# Altium PCB PCB_MEA_4_Well.PcbDoc
Units mm, origin at the board's own origin, x right, y up, seen from the top; angles counter-clockwise.
Board outline 49 x 49 mm, 4 copper layers (Top Copper Layer, Internal Copper Layer 1, Internal Copper Layer 2, Bottom Copper Layer), stack 1.58 mm thick; 1 components, 60 nets, 120 pads, 6 vias.
Unrouted connection lines stored in the file: 30.
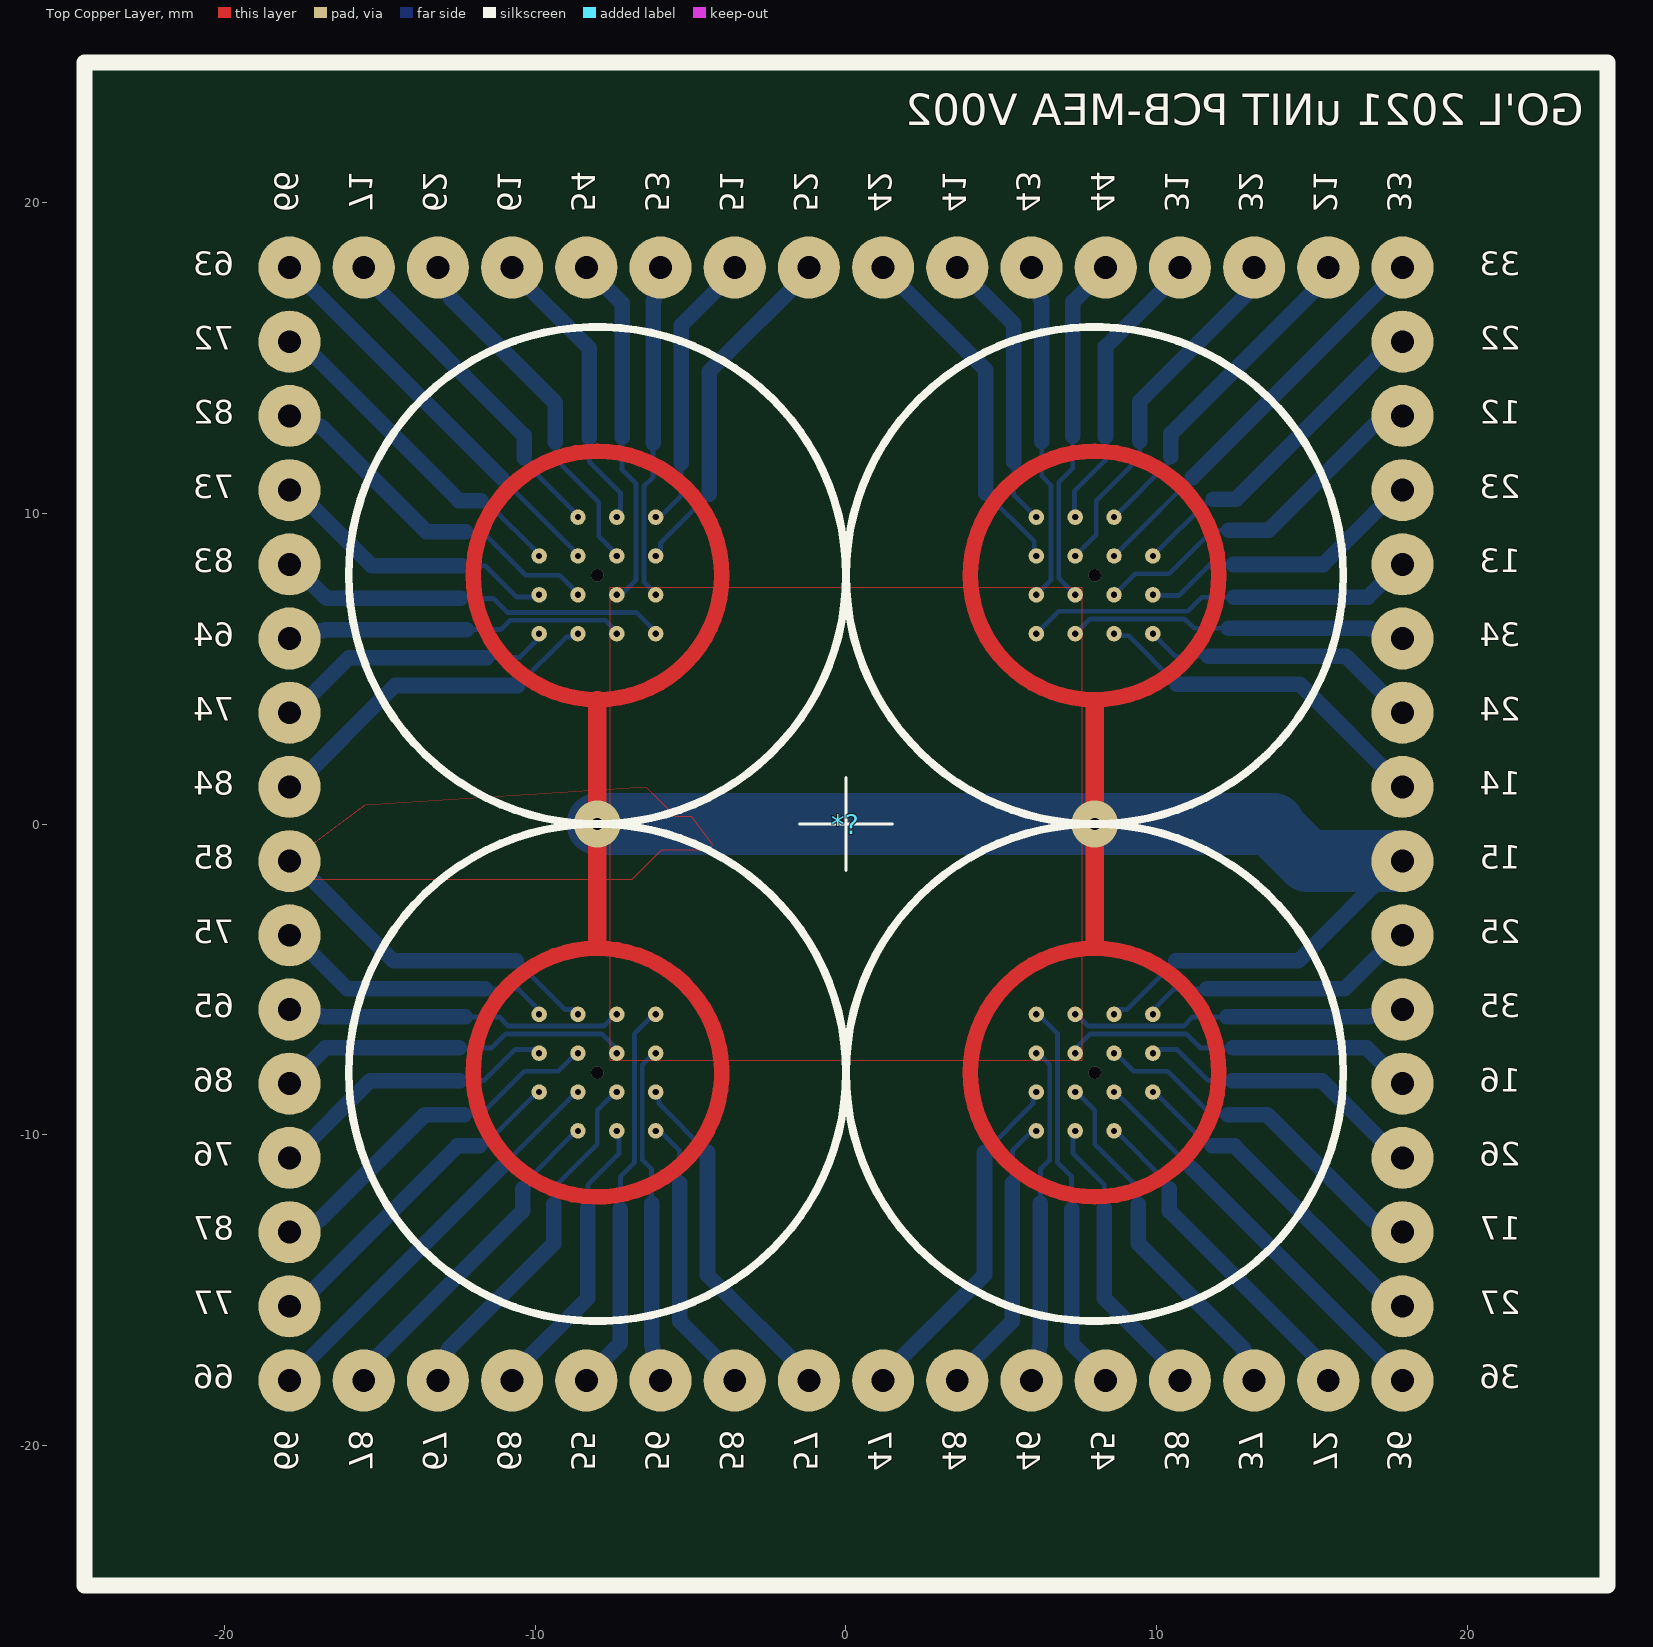
[diagram p0: Top Copper Layer view]
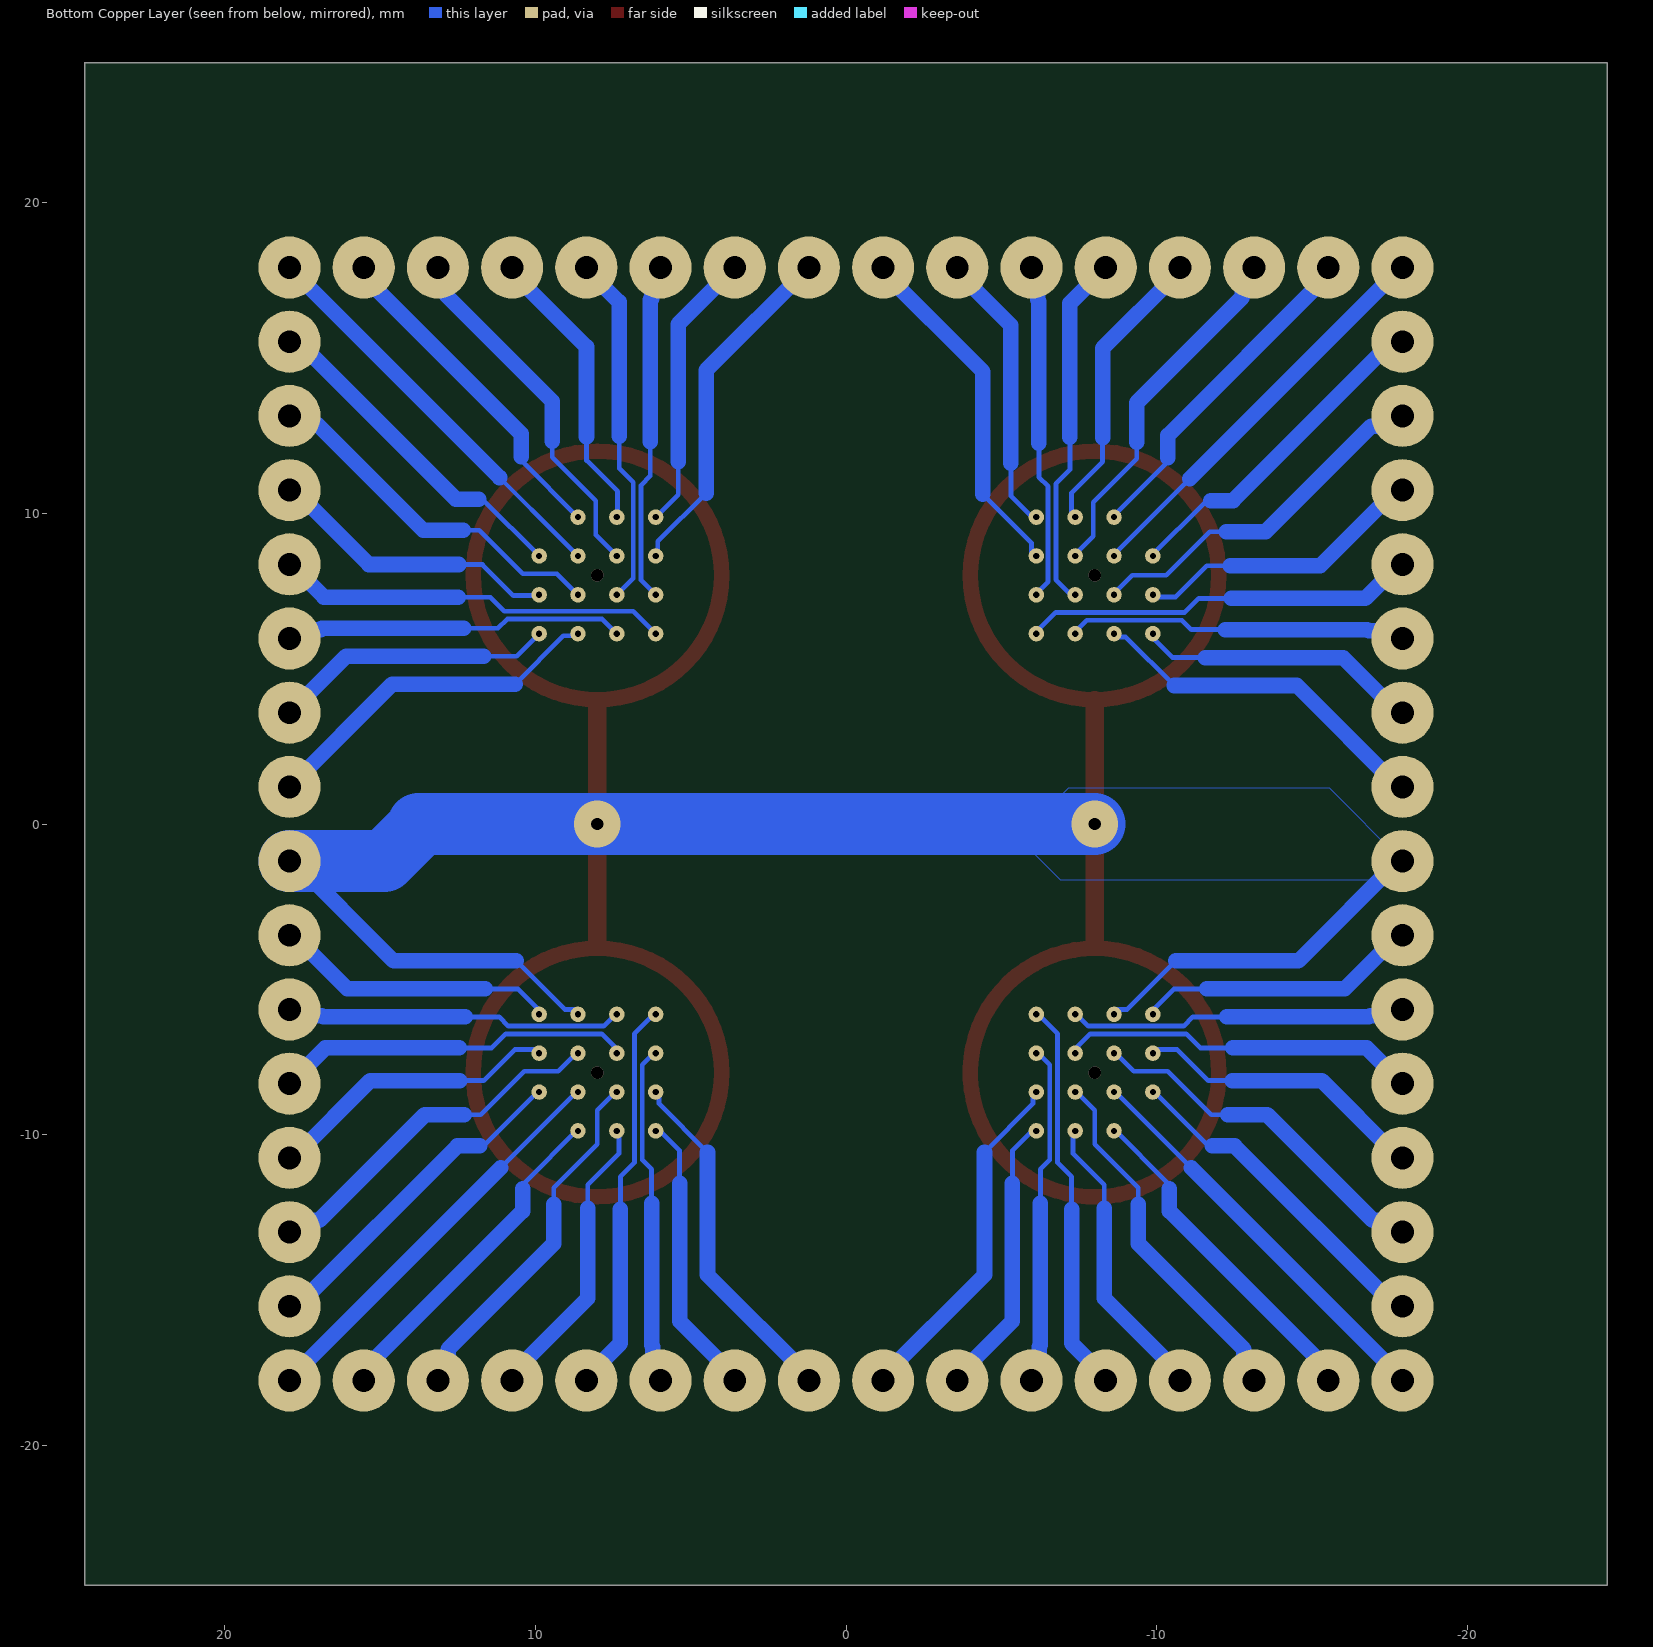
[diagram p1: Bottom Copper Layer view, seen from below]

## Layer stack, top to bottom
Top Solder: solder mask 0.01, Solder Resist, Dk 3.5
Top Copper Layer: signal copper 0.035
Dielectric 1: prepreg 0.22, FR-4, Dk 4.2
Internal Copper Layer 1: signal copper 0.035
Dielectric 2: core 1, FR-4, Dk 4.2
Internal Copper Layer 2: signal copper 0.035
Dielectric 3: prepreg 0.22, FR-4, Dk 4.2
Bottom Copper Layer: signal copper 0.035
Bottom Solder: solder mask 0.01, Solder Resist, Dk 3.5

## Board outline
24.5,-24.5 -24.5,-24.5 -24.5,24.5 24.5,24.5

## Design rules (kind name [scope] priority, off if disabled: settings)
BoardOutlineClearance [All] p1: gap=0.4 ignorepadtopadclearanceinfootprint=FALSE
Clearance [All] p1: gap=0.102 ignorepadtopadclearanceinfootprint=TRUE
ComponentClearance [All] p1: gap=0.15 collisioncheckmode=3 verticalgap=0.15 showdistances=FALSE
HoleSize [All] p1: absolutevalues=TRUE maxlimit=0.4 minlimit=0.25 maxpercent=80.000 minpercent=20.000
HoleToHoleClearance [All] p1: gap=0.45 allowstackedmicrovias=TRUE
MinimumAnnularRing [All] p1: minimumring=0.15
MinimumSolderMaskSliver [All] p1: minsoldermaskwidth=0.15
PlaneClearance [All] p1: clearance=0.15
PlaneConnect [All] p1: planeconnectstyle=Relief reliefexpansion=0.25 reliefentries=4 reliefconductorwidth=0.15 reliefairgap=0.15
PolygonConnect [All] p1: connectstyle=Direct reliefconductorwidth=0.15 reliefentries=4 polygonreliefangle="90 Angle" airgapwidth=0.15
RoomDefinition PCB_MCS_MEA_REF [InComponentClass('PCB_MCS_MEA_REF')] p1 off: confinementstyle=ConfineIn formatcopy=TRUE lockcomponents=FALSE outline -24.5,-24.5 26.3,-24.5 26.3,0.9 -24.5,0.9
RoutingVias [All] p1: holewidth=0.25 width=0.55 viastyle="Through Hole" minholewidth=0.25 minwidth=0.55 maxholewidth=0.4 maxwidth=0.8
SilkToSilkClearance [All] p1: silktosilkclearance=0.2
SilkToSolderMaskClearance [IsPad] p1: minsilkscreentomaskgap=0.2 clearancetoexposedcopper=TRUE
SolderMaskExpansion [All] p1: expansion=0.15 istentingtop=FALSE
Width [All] p1: maxlimit=50 minlimit=0.15 preferedwidth=0.203
22 further rules are at their usual default settings.

## Components (designator, comment, footprint, x,y, rotation, side; value= is the part's Value field where it differs from the comment)
*? "POGO_PINS" MCS_MEA_4WELL_1P25 0,0 r180 top locked

## Footprints (in the part's own frame and the unit in brackets; to place one, negate y for a bottom-side part, rotate by r counter-clockwise, add the part's x,y. Pads: shape width x height; smd on the part's side, far side on the other; paste and mask are expansions set on the pad)
MCS_MEA_4WELL_1P25 [mm]
  round 2 hole 0.737 mask+0.15: 12(-17.907,-13.132) 13(-17.907,-8.357) 14(-17.907,-1.194) 15(-17.907,1.194) 16(-17.907,8.357) 17(-17.907,13.132) 21(-15.519,-17.907) 22(-17.907,-15.519) 23(-17.907,-10.744) 24(-17.907,-3.581) 25(-17.907,3.581) 26(-17.907,10.744) 27(-17.907,15.519) 28(-15.519,17.907) 31(-10.744,-17.907) 32(-13.132,-17.907) 33(-17.907,-17.907) 34(-17.907,-5.969) 35(-17.907,5.969) 36(-17.907,17.907) 37(-13.132,17.907) 38(-10.744,17.907) 41(-3.581,-17.907) 42(-1.194,-17.907) 43(-5.969,-17.907) 44(-8.357,-17.907) 45(-8.357,17.907) 46(-5.969,17.907) 47(-1.194,17.907) 48(-3.581,17.907) 51(3.581,-17.907) 52(1.194,-17.907) 53(5.969,-17.907) 54(8.357,-17.907) 55(8.357,17.907) 56(5.969,17.907) 57(1.194,17.907) 58(3.581,17.907) 61(10.744,-17.907) 62(13.132,-17.907) 63(17.907,-17.907) 64(17.907,-5.969) 65(17.907,5.969) 66(17.907,17.907) 67(13.132,17.907) 68(10.744,17.907) 71(15.519,-17.907) 72(17.907,-15.519) 73(17.907,-10.744) 74(17.907,-3.581) 75(17.907,3.581) 76(17.907,10.744) 77(17.907,15.519) 78(15.519,17.907) 82(17.907,-13.132) 83(17.907,-8.357) 84(17.907,-1.194) 85(17.907,1.194) 86(17.907,8.357) 87(17.907,13.132)
  round 0.5 hole 0.2 mask+0: 12(-9.875,-8.625) 13(-9.875,-7.375) 14(-9.875,-6.125) 15(-9.875,6.125) 16(-9.875,7.375) 17(-9.875,8.625) 21(-8.625,-9.875) 22(-8.625,-8.625) 23(-8.625,-7.375) 24(-8.625,-6.125) 25(-8.625,6.125) 26(-8.625,7.375) 27(-8.625,8.625) 28(-8.625,9.875) 31(-7.375,-9.875) 32(-7.375,-8.625) 33(-7.375,-7.375) 34(-7.375,-6.125) 35(-7.375,6.125) 36(-7.375,7.375) 37(-7.375,8.625) 38(-7.375,9.875) 41(-6.125,-9.875) 42(-6.125,-8.625) 43(-6.125,-7.375) 44(-6.125,-6.125) 45(-6.125,6.125) 46(-6.125,7.375) 47(-6.125,8.625) 48(-6.125,9.875) 51(6.125,-9.875) 52(6.125,-8.625) 53(6.125,-7.375) 54(6.125,-6.125) 55(6.125,6.125) 56(6.125,7.375) 57(6.125,8.625) 58(6.125,9.875) 61(7.375,-9.875) 62(7.375,-8.625) 63(7.375,-7.375) 64(7.375,-6.125) 65(7.375,6.125) 66(7.375,7.375) 67(7.375,8.625) 68(7.375,9.875) 71(8.625,-9.875) 72(8.625,-8.625) 73(8.625,-7.375) 74(8.625,-6.125) 75(8.625,6.125) 76(8.625,7.375) 77(8.625,8.625) 78(8.625,9.875) 82(9.875,-8.625) 83(9.875,-7.375) 84(9.875,-6.125) 85(9.875,6.125) 86(9.875,7.375) 87(9.875,8.625)
  silkscreen extent -24.5,-24.5 24.5,24.5

## Via types
v1: diameter 0.4, hole 0.4, Top Copper Layer to Bottom Copper Layer, 4 vias
v2: diameter 1.5, hole 0.4, Top Copper Layer to Bottom Copper Layer, 2 vias

## Nets (pads, with @x,y where several pads share a name; then routed paths per layer and width w, separated by ;. In a path a pad name is that pad's centre, name@x,y a point inside that pad or via, vN(x,y) a via of type N, cw(c..) or ccw(c..) an arc to the next point about the centre after c; other vN are vias at no path point)
E0: *?.72 | length 13.1
  Bottom Copper Layer w0.152: -11.057,11.107 -9.035,9.085 *?.72@-8.532,8.582
  Bottom Copper Layer w0.5: -17.814,17.864 -11.057,11.107
E1: *?.82 | length 10.9
  Bottom Copper Layer w0.152: -11.733,10.407 -11.607,10.407 *?.82@-9.782,8.582
  Bottom Copper Layer w0.5: -17.814,15.476 -17.526,15.476 -12.457,10.407 -11.733,10.407
E2: *?.73 | length 11.7
  Bottom Copper Layer w0.152: -12.229,9.407 -11.707,9.407 -10.307,8.007 -9.207,8.007 *?.73@-8.532,7.332
  Bottom Copper Layer w0.5: -17.814,13.089 -17.527,12.802 -16.902,12.802 -13.507,9.407 -12.229,9.407
E3: *?.83 | length 9.4
  Bottom Copper Layer w0.152: -12.372,8.307 -11.607,8.307 -10.607,7.307 -9.807,7.307 *?.83@-9.782,7.332
  Bottom Copper Layer w0.5: -17.814,10.701 -17.651,10.701 -15.257,8.307 -12.372,8.307
E4: *?.64 | length 11
  Bottom Copper Layer w0.152: -12.203,6.257 -11.107,6.257 -10.811,6.553 -7.753,6.553 *?.64@-7.282,6.082
  Bottom Copper Layer w0.5: *?.64@-17.814,5.926 -17.527,6.213 -16.815,6.213 -16.771,6.257 -12.203,6.257
E5: *?.74 | length 11.3
  Bottom Copper Layer w0.152: -10.557,4.457 -8.999,6.015 -8.599,6.015 *?.74@-8.532,6.082
  Bottom Copper Layer w0.5: -17.814,1.151 -14.508,4.457 -10.557,4.457
E6: *?.84 | length 9.1
  Bottom Copper Layer w0.152: -11.563,5.357 -10.507,5.357 *?.84@-9.782,6.082
  Bottom Copper Layer w0.5: -17.814,3.538 -15.995,5.357 -11.563,5.357
E7: *?.85 | length 9.1
  Bottom Copper Layer w0.152: -11.613,-5.307 -10.557,-5.307 *?.85@-9.832,-6.032
  Bottom Copper Layer w0.5: -17.864,-3.488 -16.045,-5.307 -11.613,-5.307
E8: *?.75 | length 11.3
  Bottom Copper Layer w0.152: -10.607,-4.407 -9.049,-5.965 -8.649,-5.965 *?.75@-8.582,-6.032
  Bottom Copper Layer w0.5: -17.864,-1.101 -14.558,-4.407 -10.607,-4.407
E9: *?.65 | length 11
  Bottom Copper Layer w0.152: -12.253,-6.207 -11.157,-6.207 -10.861,-6.503 -7.803,-6.503 *?.65@-7.332,-6.032
  Bottom Copper Layer w0.5: *?.65@-17.864,-5.876 -17.577,-6.163 -16.865,-6.163 -16.821,-6.207 -12.253,-6.207
E10: *?.86
E11: *?.76 | length 21.1
  Bottom Copper Layer w0.152: -12.422,-8.257 -11.657,-8.257 -10.657,-7.257 -9.857,-7.257 -9.832,-7.282 ; -12.279,-9.357 -11.757,-9.357 -10.357,-7.957 -9.257,-7.957 *?.76@-8.582,-7.282
  Bottom Copper Layer w0.5: -17.864,-13.039 -17.577,-12.752 -16.952,-12.752 -13.557,-9.357 -12.279,-9.357 ; *?.76@-17.864,-10.651 -17.701,-10.651 -15.307,-8.257 -12.422,-8.257
E12: *?.87 | length 10.9
  Bottom Copper Layer w0.152: -11.783,-10.357 -11.657,-10.357 *?.87@-9.832,-8.532
  Bottom Copper Layer w0.5: -17.864,-15.426 -17.576,-15.426 -12.507,-10.357 -11.783,-10.357
E13: *?.77 | length 13.1
  Bottom Copper Layer w0.152: -11.107,-11.057 -9.085,-9.035 *?.77@-8.582,-8.532
  Bottom Copper Layer w0.5: -17.864,-17.814 -11.107,-11.057
E14: *?.66 | length 11.4
  Bottom Copper Layer w0.152: -12.443,-7.207 -11.4,-7.207 -10.95,-6.757 -7.857,-6.757 *?.66@-7.332,-7.282
  Bottom Copper Layer w0.5: -17.864,-8.264 -17.814,-8.264 -16.757,-7.207 -12.443,-7.207
E15: *?.78 | length 10.9
  Bottom Copper Layer w0.152: -10.407,-11.733 -10.407,-11.607 *?.78@-8.582,-9.782
  Bottom Copper Layer w0.5: *?.78@-15.476,-17.814 -15.476,-17.526 -10.407,-12.457 -10.407,-11.733
E16: *?.67 | length 11.7
  Bottom Copper Layer w0.152: -9.407,-12.229 -9.407,-11.707 -8.007,-10.307 -8.007,-9.207 *?.67@-7.332,-8.532
  Bottom Copper Layer w0.5: *?.67@-13.089,-17.814 -12.802,-17.527 -12.802,-16.902 -9.407,-13.507 -9.407,-12.229
E17: *?.68 | length 9.4
  Bottom Copper Layer w0.152: -8.307,-12.372 -8.307,-11.607 -7.307,-10.607 -7.307,-9.807 *?.68@-7.332,-9.782
  Bottom Copper Layer w0.5: *?.68@-10.701,-17.814 -10.701,-17.651 -8.307,-15.257 -8.307,-12.372
E18: *?.55 | length 12.7
  Bottom Copper Layer w0.152: -7.257,-12.393 -7.257,-11.35 -6.807,-10.9 -6.807,-6.757 *?.55@-6.082,-6.032
  Bottom Copper Layer w0.5: *?.55@-8.314,-17.814 -8.314,-17.764 -7.257,-16.707 -7.257,-12.393
E19: *?.56 | length 11
  Bottom Copper Layer w0.152: -6.257,-12.203 -6.257,-11.107 -6.553,-10.811 -6.553,-7.753 *?.56@-6.082,-7.282
  Bottom Copper Layer w0.5: -6.257,-12.203 -6.257,-16.771 -6.213,-16.815 -6.213,-17.527 *?.56@-5.926,-17.814
E20: *?.58 | length 9.1
  Bottom Copper Layer w0.152: *?.58@-6.082,-9.782 -5.357,-10.507 -5.357,-11.563
  Bottom Copper Layer w0.5: -5.357,-11.563 -5.357,-15.995 *?.58@-3.538,-17.814
E21: *?.57 | length 11.3
  Bottom Copper Layer w0.152: *?.57@-6.082,-8.532 -6.015,-8.599 -6.015,-8.999 -4.457,-10.557
  Bottom Copper Layer w0.5: -4.457,-10.557 -4.457,-14.508 *?.57@-1.151,-17.814
E22: *?.47 | length 11.3
  Bottom Copper Layer w0.152: 4.457,-10.557 6.015,-8.999 6.015,-8.599 *?.47@6.082,-8.532
  Bottom Copper Layer w0.5: *?.47@1.151,-17.814 4.457,-14.508 4.457,-10.557
E23: *?.48 | length 9.1
  Bottom Copper Layer w0.152: 5.357,-11.563 5.357,-10.507 *?.48@6.082,-9.782
  Bottom Copper Layer w0.5: *?.48@3.538,-17.814 5.357,-15.995 5.357,-11.563
E24: *?.46 | length 11
  Bottom Copper Layer w0.152: *?.46@6.082,-7.282 6.553,-7.753 6.553,-10.811 6.257,-11.107 6.257,-12.203
  Bottom Copper Layer w0.5: *?.46@5.926,-17.814 6.213,-17.527 6.213,-16.815 6.257,-16.771 6.257,-12.203
E25: *?.45 | length 12.7
  Bottom Copper Layer w0.152: *?.45@6.082,-6.032 6.807,-6.757 6.807,-10.9 7.257,-11.35 7.257,-12.393
  Bottom Copper Layer w0.5: 7.257,-12.393 7.257,-16.707 8.314,-17.764 *?.45@8.314,-17.814
E26: *?.38 | length 9.4
  Bottom Copper Layer w0.152: *?.38@7.332,-9.782 7.307,-9.807 7.307,-10.607 8.307,-11.607 8.307,-12.372
  Bottom Copper Layer w0.5: 8.307,-12.372 8.307,-15.257 10.701,-17.651 *?.38@10.701,-17.814
E27: *?.37 | length 11.7
  Bottom Copper Layer w0.152: *?.37@7.332,-8.532 8.007,-9.207 8.007,-10.307 9.407,-11.707 9.407,-12.229
  Bottom Copper Layer w0.5: 9.407,-12.229 9.407,-13.507 12.802,-16.902 12.802,-17.527 *?.37@13.089,-17.814
E28: *?.28 | length 10.9
  Bottom Copper Layer w0.152: *?.28@8.582,-9.782 10.407,-11.607 10.407,-11.733
  Bottom Copper Layer w0.5: 10.407,-11.733 10.407,-12.457 15.476,-17.526 *?.28@15.476,-17.814
E29: *?.36 | length 13.1
  Bottom Copper Layer w0.152: 8.582,-8.532 9.085,-9.035 11.107,-11.057
  Bottom Copper Layer w0.5: 11.107,-11.057 *?.36@17.864,-17.814
E31: *?.27 | length 10.9
  Bottom Copper Layer w0.152: 9.832,-8.532 11.657,-10.357 11.783,-10.357
  Bottom Copper Layer w0.5: 11.783,-10.357 12.507,-10.357 17.576,-15.426 *?.27@17.864,-15.426
E32: *?.17 | length 11.7
  Bottom Copper Layer w0.152: 8.582,-7.282 9.257,-7.957 10.357,-7.957 11.757,-9.357 12.279,-9.357
  Bottom Copper Layer w0.5: 12.279,-9.357 13.557,-9.357 16.952,-12.752 17.577,-12.752 *?.17@17.864,-13.039
E33: *?.26 | length 9.4
  Bottom Copper Layer w0.152: 9.832,-7.282 9.857,-7.257 10.657,-7.257 11.657,-8.257 12.422,-8.257
  Bottom Copper Layer w0.5: 12.422,-8.257 15.307,-8.257 17.701,-10.651 *?.26@17.864,-10.651
E34: *?.16 | length 11.4
  Bottom Copper Layer w0.152: 7.332,-7.282 7.857,-6.757 10.95,-6.757 11.4,-7.207 12.443,-7.207
  Bottom Copper Layer w0.5: 12.443,-7.207 16.757,-7.207 17.814,-8.264 *?.16@17.864,-8.264
E35: *?.35 | length 11
  Bottom Copper Layer w0.152: *?.35@7.332,-6.032 7.803,-6.503 10.861,-6.503 11.157,-6.207 12.253,-6.207
  Bottom Copper Layer w0.5: 12.253,-6.207 16.821,-6.207 16.865,-6.163 17.577,-6.163 *?.35@17.864,-5.876
E36: *?.25 | length 9.1
  Bottom Copper Layer w0.152: 9.832,-6.032 10.557,-5.307 11.613,-5.307
  Bottom Copper Layer w0.5: 11.613,-5.307 16.045,-5.307 *?.25@17.864,-3.488
E37: *?.15 | length 154
  Top Copper Layer w0.5: -12,-8 cw(c-8,-8) -8.025,-4 cw(c-8,-8) -12,-8 ; -4,8 ccw(c-8,8) -4,8 ; 12,-8 ccw(c8,-8) 12,-8 ; 12,8 ccw(c8,8) 12,8
  Top Copper Layer w0.6: -8,-3.95 -8,3.975 ; 8,-3.871 8,3.951
  Bottom Copper Layer w0.152: 8.582,-6.032 8.649,-5.965 9.049,-5.965 10.607,-4.407
  Bottom Copper Layer w0.5: 10.607,-4.407 14.558,-4.407 *?.15@17.864,-1.101
  Bottom Copper Layer w2: v2(-8,0) 13.762,0 ; 13.762,-0.1 14.856,-1.194 *?.15@17.907,-1.194
  other v2: 8,0
E38: *?.14 | length 11.3
  Bottom Copper Layer w0.152: 8.625,6.125 8.692,6.058 9.092,6.058 10.65,4.5
  Bottom Copper Layer w0.5: 10.65,4.5 14.601,4.5 *?.14@17.907,1.194
E39: *?.24 | length 9.1
  Bottom Copper Layer w0.152: 9.875,6.125 10.6,5.4 11.656,5.4
  Bottom Copper Layer w0.5: 11.656,5.4 16.088,5.4 *?.24@17.907,3.581
E40: *?.34 | length 11
  Bottom Copper Layer w0.152: *?.34@7.375,6.125 7.846,6.596 10.904,6.596 11.2,6.3 12.296,6.3
  Bottom Copper Layer w0.5: 12.296,6.3 16.864,6.3 16.908,6.256 17.62,6.256 *?.34@17.907,5.969
E41: *?.13 | length 12.7
  Bottom Copper Layer w0.152: 6.125,6.125 6.85,6.85 10.993,6.85 11.443,7.3 12.486,7.3
  Bottom Copper Layer w0.5: 12.486,7.3 16.8,7.3 17.857,8.357 *?.13@17.907,8.357
E42: *?.23 | length 9.4
  Bottom Copper Layer w0.152: 9.875,7.375 9.9,7.35 10.7,7.35 11.7,8.35 12.465,8.35
  Bottom Copper Layer w0.5: 12.465,8.35 15.35,8.35 17.744,10.744 *?.23@17.907,10.744
E43: *?.12 | length 11.7
  Bottom Copper Layer w0.152: 8.625,7.375 9.3,8.05 10.4,8.05 11.8,9.45 12.322,9.45
  Bottom Copper Layer w0.5: 12.322,9.45 13.6,9.45 16.995,12.845 17.62,12.845 *?.12@17.907,13.132
E44: *?.22 | length 24
  Bottom Copper Layer w0.152: *?.22@8.625,8.625 9.128,9.128 11.15,11.15 ; 9.875,8.625 11.7,10.45 11.826,10.45
  Bottom Copper Layer w0.5: 11.15,11.15 17.907,17.907 ; 11.826,10.45 12.55,10.45 17.619,15.519 *?.22@17.907,15.519
E45: *?.33 | length 11.4
  Bottom Copper Layer w0.152: 7.3,12.486 7.3,11.443 6.85,10.993 6.85,7.9 *?.33@7.375,7.375
  Bottom Copper Layer w0.5: 7.3,12.486 7.3,16.8 8.357,17.857 8.357,17.907
E46: *?.21 | length 10.9
  Bottom Copper Layer w0.152: *?.21@8.625,9.875 10.45,11.7 10.45,11.826
  Bottom Copper Layer w0.5: 10.45,11.826 10.45,12.55 15.519,17.619 *?.21@15.519,17.907
E47: *?.32 | length 11.7
  Bottom Copper Layer w0.152: *?.32@7.375,8.625 8.05,9.3 8.05,10.4 9.45,11.8 9.45,12.322
  Bottom Copper Layer w0.5: 9.45,12.322 9.45,13.6 12.845,16.995 12.845,17.62 *?.32@13.132,17.907
E48: *?.31 | length 9.4
  Bottom Copper Layer w0.152: *?.31@7.375,9.875 7.35,9.9 7.35,10.7 8.35,11.7 8.35,12.465
  Bottom Copper Layer w0.5: 8.35,12.465 8.35,15.35 10.744,17.744 *?.31@10.744,17.907
E49: *?.44
E50: *?.43 | length 11
  Bottom Copper Layer w0.152: *?.43@6.125,7.375 6.596,7.846 6.596,10.904 6.3,11.2 6.3,12.296
  Bottom Copper Layer w0.5: *?.43@5.969,17.907 6.256,17.62 6.256,16.908 6.3,16.864 6.3,12.296
E51: *?.41 | length 9.1
  Bottom Copper Layer w0.152: 5.4,11.656 5.4,10.6 *?.41@6.125,9.875
  Bottom Copper Layer w0.5: *?.41@3.581,17.907 5.4,16.088 5.4,11.656
E52: *?.42 | length 11.3
  Bottom Copper Layer w0.152: 4.5,10.65 6.058,9.092 6.058,8.692 *?.42@6.125,8.625
  Bottom Copper Layer w0.5: *?.42@1.194,17.907 4.5,14.601 4.5,10.65
E53: *?.52 | length 11.3
  Bottom Copper Layer w0.152: *?.52@-6.032,8.582 -5.965,8.649 -5.965,9.049 -4.407,10.607
  Bottom Copper Layer w0.5: -4.407,10.607 -4.407,14.558 *?.52@-1.101,17.864
E54: *?.51 | length 9.1
  Bottom Copper Layer w0.152: *?.51@-6.032,9.832 -5.307,10.557 -5.307,11.613
  Bottom Copper Layer w0.5: -5.307,11.613 -5.307,16.045 *?.51@-3.488,17.864
E55: *?.53 | length 11
  Bottom Copper Layer w0.152: -6.207,12.253 -6.207,11.157 -6.503,10.861 -6.503,7.803 *?.53@-6.032,7.332
  Bottom Copper Layer w0.5: -6.207,12.253 -6.207,16.821 -6.163,16.865 -6.163,17.577 *?.53@-5.876,17.864
E56: *?.54 | length 12.7
  Bottom Copper Layer w0.152: -12.393,7.257 -11.35,7.257 -10.9,6.807 -6.757,6.807 *?.54@-6.032,6.082
  Bottom Copper Layer w0.5: -17.814,8.314 -17.764,8.314 -16.707,7.257 -12.393,7.257
E57: *?.61 | length 9.4
  Bottom Copper Layer w0.152: -8.257,12.422 -8.257,11.657 -7.257,10.657 -7.257,9.857 *?.61@-7.282,9.832
  Bottom Copper Layer w0.5: *?.61@-10.651,17.864 -10.651,17.701 -8.257,15.307 -8.257,12.422
E58: *?.62 | length 11.7
  Bottom Copper Layer w0.152: -9.357,12.279 -9.357,11.757 -7.957,10.357 -7.957,9.257 *?.62@-7.282,8.582
  Bottom Copper Layer w0.5: *?.62@-13.039,17.864 -12.752,17.577 -12.752,16.952 -9.357,13.557 -9.357,12.279
E59: *?.71 | length 10.9
  Bottom Copper Layer w0.152: -10.357,11.783 -10.357,11.657 *?.71@-8.532,9.832
  Bottom Copper Layer w0.5: *?.71@-15.426,17.864 -15.426,17.576 -10.357,12.507 -10.357,11.783
E60: *?.63 | length 11.4
  Bottom Copper Layer w0.152: *?.63@-7.282,7.332 -6.757,7.857 -6.757,10.95 -7.207,11.4 -7.207,12.443
  Bottom Copper Layer w0.5: -8.264,17.864 -8.264,17.814 -7.207,16.757 -7.207,12.443
copper on no net:
  other v1: -8,-8 8,-8 -8,8 8,8

## Polygon pours and split planes (outlines as drawn)
E37 on Bottom Copper Layer "NONET_L04_P000" (solid, shelved, pour order 0): -17.907,-1.194 -15.563,1.15 -7.15,1.15 -6.25,0.25 -4.975,0.25 -4.3,-0.65 -4.3,-0.85 -5.95,-0.85 -6.9,-1.8 -17.301,-1.8
E37 on Top Copper Layer "NONET_L01_P004" (solid, shelved, pour order 4): -7.6,-7.6 7.6,-7.6 7.6,7.6 -7.6,7.6
E37 on Top Copper Layer "NONET_L01_P002" (solid, shelved, pour order 2): -18.079,-1.321 -15.466,0.62 -6.445,1.195 -5.5,0.25 -4.975,0.25 -4.3,-0.65 -4.4,-0.85 -5.95,-0.85 -6.9,-1.8 -17.6,-1.8

## Silkscreen, mask and mechanical layers (free items; w line width, h text height)
Top Overlay:
  lines w0.1: 0,-1.5 0,1.5 ; 0,-1.5 0,1.5 ; 0,-1.5 0,1.5 ; -1.5,0 1.5,0 -1.5,0
  lines w0.508: -24.5,-24.5 -24.5,24.5 ; -24.5,-24.5 24.5,-24.5 ; -24.5,-24.5 24.5,-24.5 ; -24.5,-24.5 -24.5,24.5 ; -24.5,24.5 24.5,24.5 ; -24.5,24.5 24.5,24.5 ; 24.5,-24.5 24.5,24.5 ; 24.5,-24.5 24.5,24.5
  text "GO'L 2021 uNIT PCB-MEA V002" at 23.738,22.49 h1.02

## Text inside footprints (layer, text, board x,y; h text height)
*?: Top Overlay "33" at 21.717,17.653 h0.76; Top Overlay "22" at 21.717,15.265 h0.76; Top Overlay "12" at 21.717,12.878 h0.76; Top Overlay "23" at 21.717,10.49 h0.76; Top Overlay "13" at 21.717,8.103 h0.76; Top Overlay "34" at 21.717,5.715 h0.76; Top Overlay "24" at 21.717,3.327 h0.76; Top Overlay "14" at 21.717,0.94 h0.76; Top Overlay "15" at 21.717,-1.448 h0.76; Top Overlay "25" at 21.717,-3.835 h0.76; Top Overlay "35" at 21.717,-6.223 h0.76; Top Overlay "16" at 21.717,-8.611 h0.76; Top Overlay "26" at 21.717,-10.998 h0.76; Top Overlay "17" at 21.717,-13.386 h0.76; Top Overlay "27" at 21.717,-15.773 h0.76; Top Overlay "36" at 21.717,-18.161 h0.76; Top Overlay "63" at -19.685,17.653 h0.76; Top Overlay "72" at -19.685,15.265 h0.76; Top Overlay "82" at -19.685,12.878 h0.76; Top Overlay "73" at -19.685,10.49 h0.76; Top Overlay "83" at -19.685,8.103 h0.76; Top Overlay "64" at -19.685,5.715 h0.76; Top Overlay "74" at -19.685,3.327 h0.76; Top Overlay "84" at -19.685,0.94 h0.76; Top Overlay "85" at -19.685,-1.448 h0.76; Top Overlay "75" at -19.685,-3.835 h0.76; Top Overlay "65" at -19.685,-6.223 h0.76; Top Overlay "86" at -19.685,-8.611 h0.76; Top Overlay "76" at -19.685,-10.998 h0.76; Top Overlay "87" at -19.685,-13.386 h0.76; Top Overlay "77" at -19.685,-15.773 h0.76; Top Overlay "66" at -19.685,-18.161 h0.76; Top Overlay "36" at 17.437,-20.832 h0.76 r270; Top Overlay "72" at 15.049,-20.832 h0.76 r270; Top Overlay "37" at 12.662,-20.832 h0.76 r270; Top Overlay "38" at 10.274,-20.832 h0.76 r270; Top Overlay "45" at 7.887,-20.832 h0.76 r270; Top Overlay "46" at 5.499,-20.832 h0.76 r270; Top Overlay "48" at 3.111,-20.832 h0.76 r270; Top Overlay "47" at 0.724,-20.832 h0.76 r270; Top Overlay "57" at -1.664,-20.832 h0.76 r270; Top Overlay "58" at -4.051,-20.832 h0.76 r270; Top Overlay "56" at -6.439,-20.832 h0.76 r270; Top Overlay "55" at -8.826,-20.832 h0.76 r270; Top Overlay "68" at -11.214,-20.832 h0.76 r270; Top Overlay "67" at -13.602,-20.832 h0.76 r270; Top Overlay "78" at -15.989,-20.832 h0.76 r270; Top Overlay "66" at -18.377,-20.832 h0.76 r270; Top Overlay "33" at 17.437,19.681 h0.76 r270; Top Overlay "21" at 15.05,19.681 h0.76 r270; Top Overlay "32" at 12.662,19.681 h0.76 r270; Top Overlay "31" at 10.274,19.681 h0.76 r270; Top Overlay "44" at 7.887,19.681 h0.76 r270; Top Overlay "43" at 5.499,19.681 h0.76 r270; Top Overlay "41" at 3.112,19.681 h0.76 r270; Top Overlay "42" at 0.724,19.681 h0.76 r270; Top Overlay "52" at -1.664,19.681 h0.76 r270; Top Overlay "51" at -4.051,19.681 h0.76 r270; Top Overlay "53" at -6.439,19.681 h0.76 r270; Top Overlay "54" at -8.826,19.681 h0.76 r270; Top Overlay "61" at -11.214,19.681 h0.76 r270; Top Overlay "62" at -13.602,19.681 h0.76 r270; Top Overlay "71" at -15.989,19.681 h0.76 r270; Top Overlay "66" at -18.377,19.681 h0.76 r270